# Altium PCB PCB1.pcbdoc
Units mil, origin at the board's own origin, x right, y up, seen from the top; angles counter-clockwise.
Board outline 6855 x 3415 mil, 2 copper layers (Top Layer, Bottom Layer), stack 1.928 mil thick; 4 components, 5 nets, 37 pads, 33 vias.
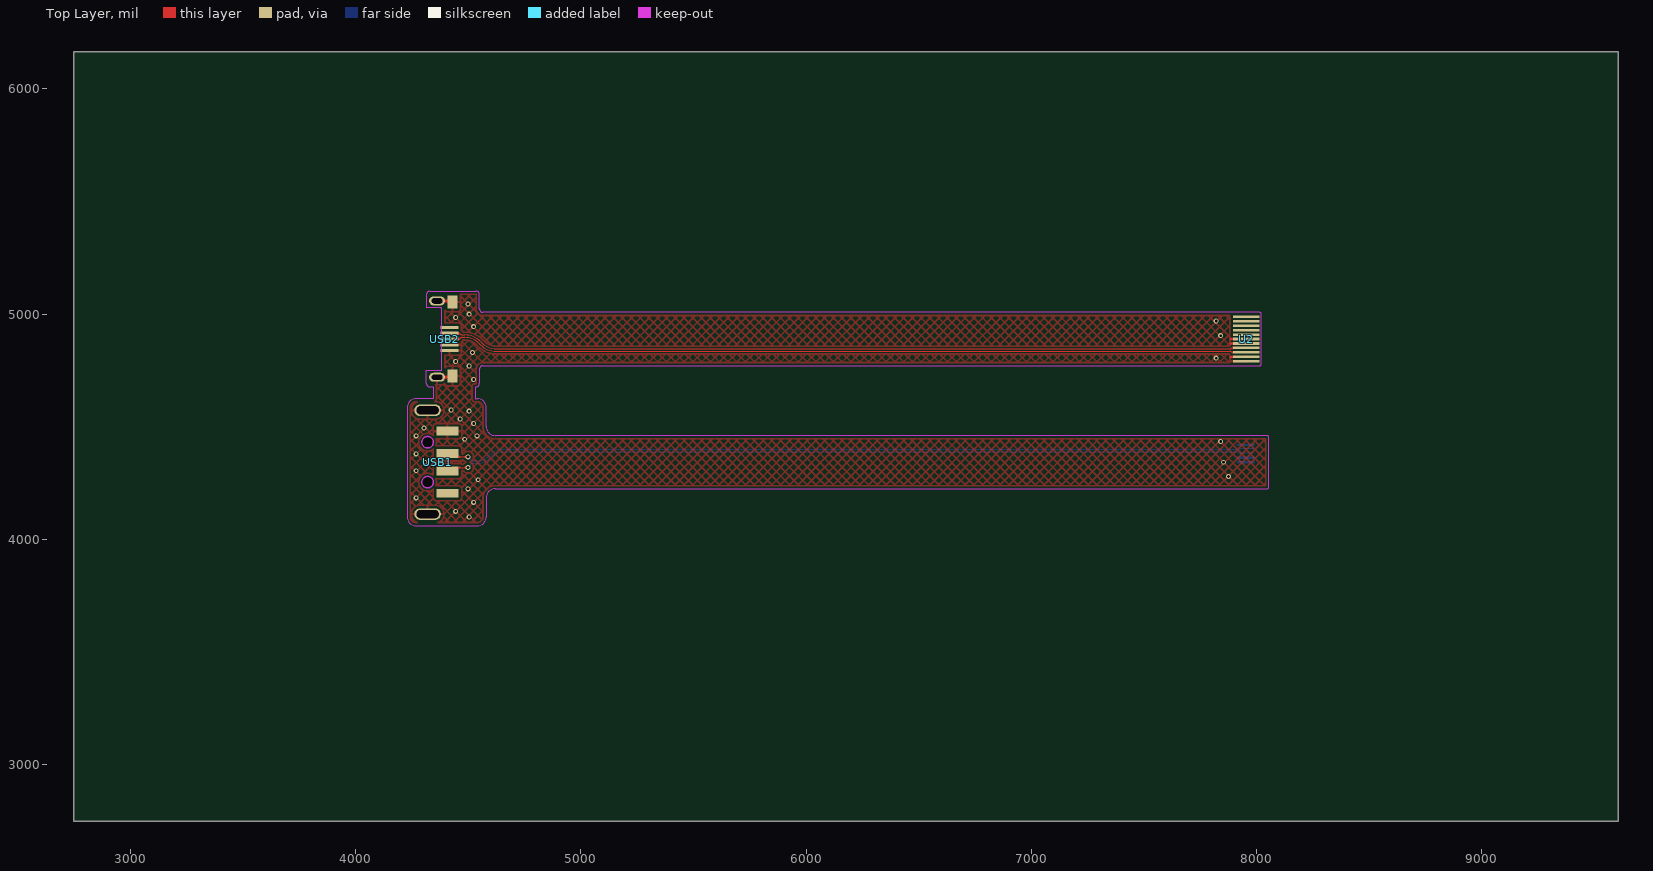
[diagram p0: Top Layer view]
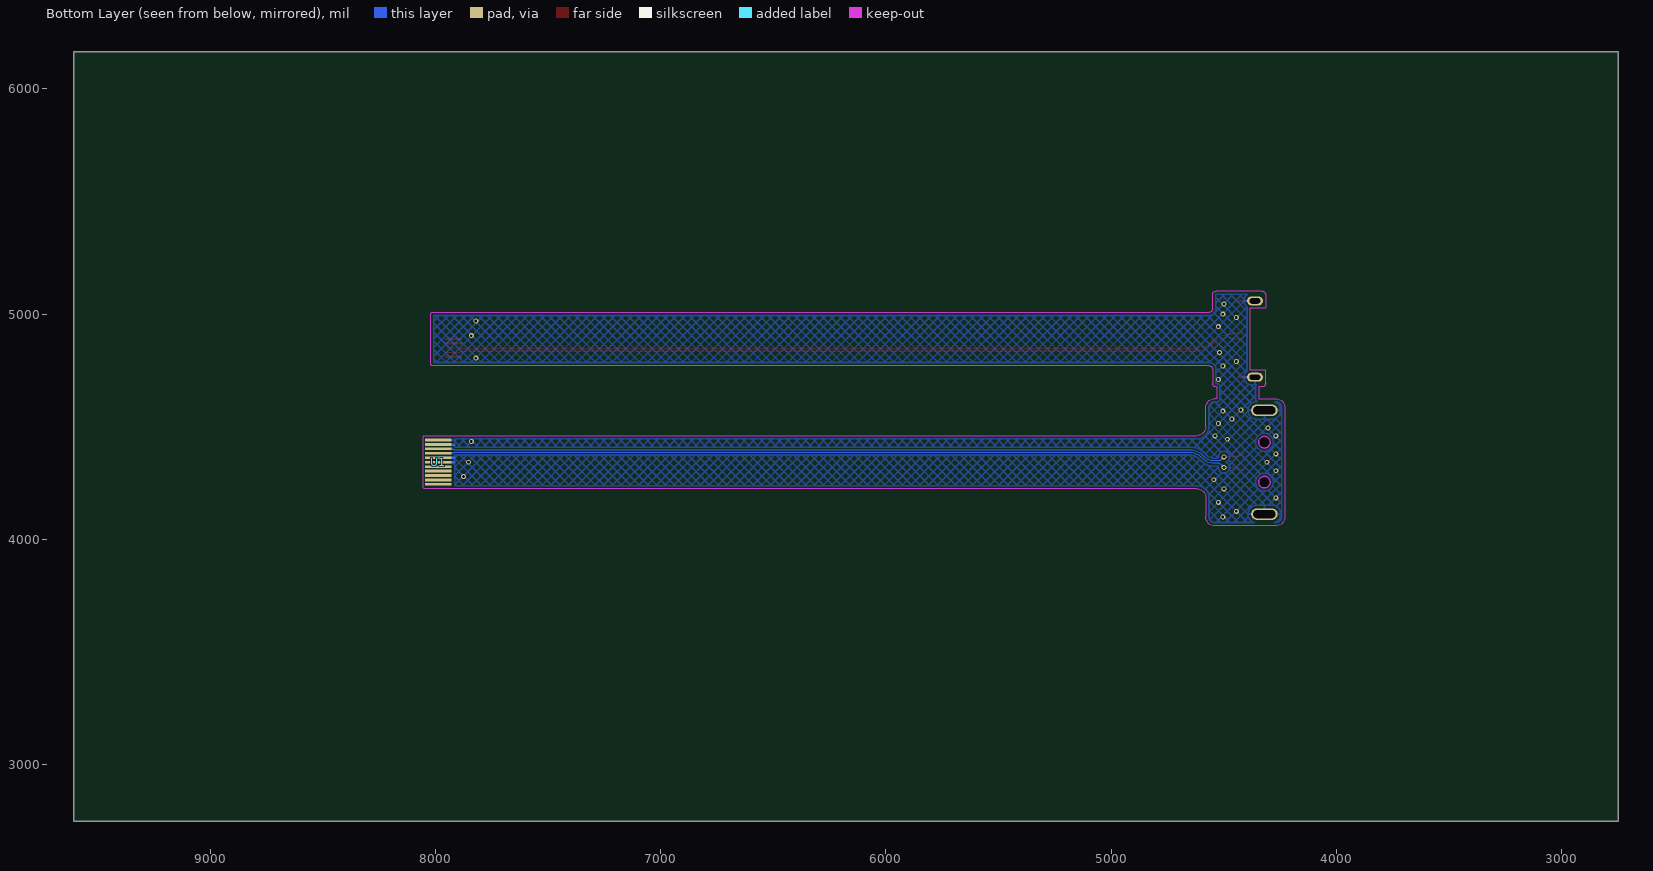
[diagram p1: Bottom Layer view, seen from below]

## Layer stack, top to bottom
Top Solder Mask Layer: solder mask 1.063, Dk 3.3
Top Layer: signal copper 0.472
Dielectric1: surface 0.984, FR4, Dk 4.5
Bottom Layer: signal copper 0.472
Bottom Solder Mask Layer: solder mask 1.063, Dk 3.3

## Board outline
9605,2750 2750,2750 2750,6165 9605,6165

## Design rules (kind name [scope] priority, off if disabled: settings)
BoardOutlineClearance copperThickness2oz_1 [All] p2 off: genericclearance=7.99 ignorepadtopadclearanceinfootprint=FALSE except(0: Arc-SplitContinuation Track-SplitContinuation SMDPad-SplitContinuation THPad-SplitContinuation Via-SplitContinuation Fill-SplitContinuation Region-SplitContinuation Poly-SplitContinuation Text-SplitContinuation Hole-SplitContinuation; 5.98: Arc-CutoutEdge SMDPad-CutoutEdge THPad-CutoutEdge Via-CutoutEdge Fill-CutoutEdge Region-CutoutEdge Text-CutoutEdge; 6.93: Hole-OutlineEdge Hole-CutoutEdge; 10: Poly-OutlineEdge Poly-CutoutEdge; 11.81: Arc-OutlineEdge Track-OutlineEdge SMDPad-OutlineEdge THPad-OutlineEdge Via-OutlineEdge Fill-OutlineEdge Region-OutlineEdge Text-OutlineEdge Track-CutoutEdge)
BoardOutlineClearance copperThickness1oz_1 [All] p4: genericclearance=4.02 ignorepadtopadclearanceinfootprint=FALSE except(0: Arc-SplitContinuation Track-SplitContinuation SMDPad-SplitContinuation THPad-SplitContinuation Via-SplitContinuation Fill-SplitContinuation Region-SplitContinuation Poly-SplitContinuation Text-SplitContinuation Hole-SplitContinuation; 6: SMDPad-CutoutEdge THPad-CutoutEdge Via-CutoutEdge Fill-CutoutEdge Region-CutoutEdge Text-CutoutEdge; 6.93: Hole-OutlineEdge Hole-CutoutEdge; 10: Poly-OutlineEdge Poly-CutoutEdge; 11.8: Arc-OutlineEdge Track-OutlineEdge SMDPad-OutlineEdge THPad-OutlineEdge Via-OutlineEdge Fill-OutlineEdge Region-OutlineEdge Text-OutlineEdge; 11.81: Arc-CutoutEdge Track-CutoutEdge)
Clearance copperThickness2oz [All] p1 off: gap=7.99 ignorepadtopadclearanceinfootprint=FALSE except(5.98: SMDPad-Track SMDPad-SMDPad THPad-Track SMDPad-THPad THPad-THPad Track-Via SMDPad-Via THPad-Via Via-Via Fill-Track Region-Track Fill-SMDPad Region-SMDPad Fill-THPad Region-THPad Fill-Via Region-Via Fill-Fill Fill-Region Region-Region Arc-Track Arc-SMDPad Arc-THPad Arc-Via Fill-Arc Region-Arc Arc-Arc Text-Track SMDPad-Text Text-THPad Text-Via Fill-Text Region-Text Arc-Text Text-Text; 6.93: Hole-Track Hole-SMDPad Hole-THPad Hole-Via Fill-Hole Region-Hole Hole-Arc Hole-Text; 10: Poly-Track Poly-SMDPad Poly-THPad Poly-Via Poly-Fill Poly-Region Poly-Poly Poly-Arc Poly-Text Poly-Hole)
Clearance copperThickness1oz [All] p3: gap=4.02 ignorepadtopadclearanceinfootprint=FALSE except(5.51: Poly-Track; 5.98: SMDPad-Track SMDPad-SMDPad THPad-Track SMDPad-THPad THPad-THPad Track-Via SMDPad-Via THPad-Via Via-Via Fill-Track Region-Track Fill-SMDPad Region-SMDPad Fill-THPad Region-THPad Fill-Via Region-Via Fill-Fill Fill-Region Region-Region; 6: Arc-Track Arc-SMDPad Arc-THPad Arc-Via Fill-Arc Region-Arc Arc-Arc Text-Track SMDPad-Text Text-THPad Text-Via Fill-Text Region-Text Arc-Text Text-Text; 6.93: Hole-Track Hole-SMDPad Hole-THPad Hole-Via Fill-Hole Region-Hole Hole-Arc Hole-Text; 10: Poly-SMDPad Poly-THPad Poly-Via Poly-Fill Poly-Region Poly-Poly Poly-Arc Poly-Text Poly-Hole)
Creepage creepage [All] p1: checkdistance=0 ignoreinternallayers=TRUE applytopolygonpour=TRUE
DiffPairsRouting differentialPair [All] p1: maxlimit=6 minlimit=6 mostfreqgap=6 toplayer_minwidth=0.4 toplayer_prefwidth=5.1 toplayer_maxwidth=118.1 toplayer_mingap=0.4 toplayer_prefgap=5.9 toplayer_maxgap=5.9 bottomlayer_minwidth=0.4 bottomlayer_prefwidth=5.1 bottomlayer_maxwidth=118.1 bottomlayer_mingap=0.4 bottomlayer_prefgap=5.9 bottomlayer_maxgap=5.9 maxuncoupledlength=10
HoleToHoleClearance otherClearance [All] p1: gap=11.81 allowstackedmicrovias=TRUE
Length netLength [All] p1: minlimit=0 maxlimit=0
MatchedLengths netLengthTolerance [All] p1: tolerance=1000
PasteMaskExpansion pasteMaskExpansion [All] p1: expansion=0
PlaneConnect innerPlane [All] p1: planeconnectstyle=Relief reliefexpansion=20 reliefentries=4 reliefconductorwidth=10 reliefairgap=10
PolygonConnect "copperRegion_Top Layer" [(OnLayer('Top Layer'))] p1: connectstyle=Relief reliefconductorwidth=10 reliefentries=4 polygonreliefangle="90 Angle" airgapwidth=10 via.connectstyle=Relief via.reliefconductorwidth=10 via.reliefentries=4 via.polygonreliefangle="90 Angle" via.airgapwidth=10
PolygonConnect "copperRegion_Bottom Layer" [(OnLayer('Bottom Layer'))] p2: connectstyle=Relief reliefconductorwidth=10 reliefentries=4 polygonreliefangle="90 Angle" airgapwidth=10 via.connectstyle=Relief via.reliefconductorwidth=10 via.reliefentries=4 via.polygonreliefangle="90 Angle" via.airgapwidth=10
PolygonConnect copperRegion [All] p3: connectstyle=Direct reliefconductorwidth=10 reliefentries=4 polygonreliefangle="90 Angle" airgapwidth=10 via.connectstyle=Relief via.reliefconductorwidth=10 via.reliefentries=4 via.polygonreliefangle="90 Angle" via.airgapwidth=10
RoutingVias viaSize [All] p1: holewidth=11.81 width=21.65 viastyle="Through Hole" minholewidth=11.81 minwidth=19.68 maxholewidth=248.03 maxwidth=393.7
SolderMaskExpansion solderMaskExpansion [IsVia] p1: expansion=-1000 istentingtop=TRUE
SolderMaskExpansion solderMaskExpansion [All] p2: expansion=2 istentingtop=FALSE
Width copperThickness2oz_2 [All] p1 off: maxlimit=100 minlimit=8 preferedwidth=10
Width copperThickness1oz_2 [All] p2: maxlimit=100 minlimit=5 preferedwidth=10

## Components (designator, comment, footprint, x,y, rotation, side; value= is the part's Value field where it differs from the comment)
U1 "" BL-M8812EU2-FPC#1 7987.09,4343.11 r180 bottom
U2 "" BL-M8812EU2-FPC#2 7954.02,4888.15 r180 top
USB1 "USB-212-BCW" USB-A-SMD_USB-212-BCW 4365,4343.11 r270 top
USB2 "MICRO-ZD-103PWB" MICRO-USB-SMD_ZD-103PWB 4397.13,4889.72 r90 top

## Footprints (in the part's own frame and the unit in brackets; to place one, negate y for a bottom-side part, rotate by r counter-clockwise, add the part's x,y. Pads: shape width x height; smd on the part's side, far side on the other; paste and mask are expansions set on the pad)
BL-M8812EU2-FPC#1 [mm]
  rect 3x0.3 smd: 1(0,2.5) 2(0,2) 3(0,1.5) 4(0,1) 5(0,0.5) 6(0,0) 7(0,-0.5) 8(0,-1) 9(0,-1.5) 10(0,-2) 11(0,-2.5)
BL-M8812EU2-FPC#2 [mm]
  rect 3x0.3 smd: 1(0,2.46) 2(0,1.96) 3(0,1.46) 4(0,0.96) 5(0,0.46) 6(0,-0.04) 7(0,-0.54) 8(0,-1.04) 9(0,-1.54) 10(0,-2.04) 11(0,-2.54)
MICRO-USB-SMD_ZD-103PWB [mm]
  rect 0.35x2 smd paste-100 mask+0.051: 1(1.3,-0.525) 2(0.65,-0.525) 3(0,-0.525) 4(-0.65,-0.525) 5(-1.3,-0.525)
  oval 1x1.8 hole 0.6 slot 1.2 at 90 deg: 6(-4.3,0.875) 6(4.3,0.875)
  rect 1.5x1.1 smd paste-100 mask+0.051: 7(-4.175,-0.875) 7(4.175,-0.875)
USB-A-SMD_USB-212-BCW [mm]
  rect 1x2.5 smd paste-100 mask+0.051: 1(3.5,1.125) 2(1,1.125) 3(-1,1.125) 4(-3.5,1.125)
  oval 1.3x3 hole 0.9 slot 2.5 at 90 deg: 5(-5.85,-1.125) 5(5.85,-1.125)
  Board Outline Layer circle w0.003: c-2.25,-1.125 r0.65
  Board Outline Layer circle w0.003: c2.25,-1.125 r0.65
  Board Outline Layer region: -2.25,-0.475 -1.968,-0.539 -1.742,-0.72 -1.616,-0.98 -1.616,-1.27 -1.742,-1.53 -1.968,-1.711 -2.25,-1.775 -2.25,-1.775 -2.532,-1.711 -2.758,-1.53 -2.884,-1.27 -2.884,-0.98 -2.758,-0.72 -2.532,-0.539 -2.25,-0.475
  Board Outline Layer region: -2.25,-0.475 -2.137,-0.485 -2.028,-0.514 -1.925,-0.562 -1.832,-0.627 -1.752,-0.707 -1.687,-0.8 -1.639,-0.903 -1.61,-1.012 -1.6,-1.125 -1.61,-1.238 -1.639,-1.347 -1.687,-1.45 -1.752,-1.543 -1.832,-1.623 -1.925,-1.688 -2.028,-1.736 -2.137,-1.765 -2.25,-1.775 -2.363,-1.765 -2.472,-1.736 -2.575,-1.688 -2.668,-1.623 -2.748,-1.543 -2.813,-1.45 -2.861,-1.347 -2.89,-1.238 -2.9,-1.125 -2.89,-1.012 -2.861,-0.903 -2.813,-0.8 -2.748,-0.707 -2.668,-0.627 -2.575,-0.562 -2.472,-0.514 -2.363,-0.485
  Board Outline Layer region: 2.25,-0.475 2.532,-0.539 2.758,-0.72 2.884,-0.98 2.884,-1.27 2.758,-1.53 2.532,-1.711 2.25,-1.775 2.25,-1.775 1.968,-1.711 1.742,-1.53 1.616,-1.27 1.616,-0.98 1.742,-0.72 1.968,-0.539 2.25,-0.475
  Board Outline Layer region: 2.25,-0.475 2.363,-0.485 2.472,-0.514 2.575,-0.562 2.668,-0.627 2.748,-0.707 2.813,-0.8 2.861,-0.903 2.89,-1.012 2.9,-1.125 2.89,-1.238 2.861,-1.347 2.813,-1.45 2.748,-1.543 2.668,-1.623 2.575,-1.688 2.472,-1.736 2.363,-1.765 2.25,-1.775 2.137,-1.765 2.027,-1.736 1.925,-1.688 1.832,-1.623 1.752,-1.543 1.687,-1.45 1.639,-1.347 1.61,-1.238 1.6,-1.125 1.61,-1.012 1.639,-0.903 1.687,-0.8 1.752,-0.707 1.832,-0.627 1.925,-0.562 2.027,-0.514 2.137,-0.485
  Multi-Layer board cut-out: -2.25,-0.475 -1.968,-0.539 -1.742,-0.72 -1.616,-0.98 -1.616,-1.27 -1.742,-1.53 -1.968,-1.711 -2.25,-1.775 -2.25,-1.775 -2.532,-1.711 -2.758,-1.53 -2.884,-1.27 -2.884,-0.98 -2.758,-0.72 -2.532,-0.539 -2.25,-0.475
  Multi-Layer board cut-out: 2.25,-0.475 2.532,-0.539 2.758,-0.72 2.884,-0.98 2.884,-1.27 2.758,-1.53 2.532,-1.711 2.25,-1.775 2.25,-1.775 1.968,-1.711 1.742,-1.53 1.616,-1.27 1.616,-0.98 1.742,-0.72 1.968,-0.539 2.25,-0.475

## Via types
v1: diameter 21.65, hole 11.8, Top Layer to Bottom Layer, 33 vias

## Nets (pads, with @x,y where several pads share a name; then routed paths per layer and width w, separated by ;. In a path a pad name is that pad's centre, name@x,y a point inside that pad or via, vN(x,y) a via of type N, cw(c..) or ccw(c..) an arc to the next point about the centre after c; other vN are vias at no path point)
$1N1: U2.3 USB2.3 | length 3556.9
  Top Layer w5.12: USB2.3 4457.1,4889.73 ccw(c4457.1,4902.24) 4465.95,4893.39 cw(c4474.69,4884.66) 4474.69,4897.01 4485.54,4897.01 cw(c4485.54,4808.04) 4548.46,4870.95 4555.12,4864.29 ccw(c4625.83,4935) 4625.83,4835 7882.45,4835 cw(c7882.45,4827.61) 7887.68,4832.84 ccw(c7892.9,4838.06) 7892.9,4830.67 U2.3
$1N2: U2.4 USB2.2 | length 3556.9
  Top Layer w5.12: USB2.2 4457.1,4915.32 cw(c4457.1,4902.81) 4465.95,4911.66 ccw(c4474.69,4920.39) 4474.69,4908.04 4485.54,4908.04 cw(c4485.54,4808.04) 4556.25,4878.75 4562.92,4872.08 ccw(c4625.83,4935) 4625.83,4846.02 7882.45,4846.02 ccw(c7882.45,4853.42) 7887.68,4848.19 cw(c7892.9,4842.96) 7892.9,4850.35 U2.4
$1N7: U1.3 USB1.3 | length 3604.7
  Top Layer w5.12: USB1.3 cw(c4409.29,4371.46) 4417.08,4379.26 ccw(c4447.32,4409.49) 4447.32,4366.73 v1(4500,4366.73)
  Bottom Layer w5.12: v1(4500,4366.73) 4514.49,4352.24 ccw(c4523.23,4360.98) 4523.23,4348.62 4545,4348.62 ccw(c4545,4405.65) 4585.33,4365.33 4595,4375 cw(c4650.13,4319.87) 4650.13,4397.83 7915.52,4397.83 ccw(c7915.52,4405.23) 7920.75,4400 cw(c7925.98,4394.77) 7925.98,4402.17 U1.3
$1N8: U1.4 USB1.2 | length 3604.7
  Top Layer w5.12: USB1.2 ccw(c4409.29,4314.77) 4417.08,4306.97 cw(c4447.3,4276.76) 4447.3,4319.49 v1(4500,4319.49)
  Bottom Layer w5.12: v1(4500,4319.49) 4514.49,4333.98 cw(c4523.23,4325.24) 4523.23,4337.6 4545,4337.6 ccw(c4545,4405.65) 4593.12,4357.53 4602.79,4367.21 cw(c4650.13,4319.87) 4650.13,4386.81 7915.52,4386.81 cw(c7915.52,4379.42) 7920.75,4384.65 ccw(c7925.98,4389.87) 7925.98,4382.48 U1.4
GND: U1.1 U1.2 U1.5 U1.6 U2.1 U2.2 U2.5 U2.6 USB1.4 USB1.5 USB2.4 USB2.5 USB2.6 USB2.7 | length 568.5
  Top Layer w10: USB2.6@4362.68,4720.43 4426.66,4720.43 ccw(c4426.66,4725.35) USB2.7@4431.58,4725.35 ; USB2.6@4362.68,5059.02 4426.65,5059.02 cw(c4426.65,5054.09) USB2.7@4431.58,5054.09 ; 7885,4810 7953.03,4810 ccw(c7953.03,4810.98) U2.2 ; 7885,4870 U2.5 ; 7885,4890 7953.74,4890 cw(c7953.74,4889.72) U2.6
  Bottom Layer w10: 7915,4343.11 U1.6 ; 7915,4362.8 U1.5 ; 7915,4420 7985.24,4420 ccw(c7985.24,4421.85) U1.2
  other v1: 4505,4100 4445,4125 4525,4165 4270,4185 4500,4225 4545,4265 7875,4280 4270,4305 4309.94,4343.11 7852.98,4343.11 4270,4380 7840,4435 4485,4445 4270,4460 4540,4460 4305,4495 4525,4515 4465,4535 4505,4570 4425,4575 4525,4710 4505,4770 4445,4790 7820,4805 4520,4830 7840,4905 4525,4945 7820,4970 4445,4985 4505,5000 4500,5045
pads on no net: U1.7 U1.8 U1.9 U1.10 U1.11 U2.7 U2.8 U2.9 U2.10 U2.11 USB1.1 USB2.1

## Polygon pours and split planes (outlines as drawn)
GND on Bottom Layer (hatched 45Degree grid 27.558999999999997 track 7.874, remove dead copper, pour order 2): 3000,5915 3000,3390 8670,3390 8670,5915
GND on Top Layer (hatched 45Degree grid 27.558999999999997 track 7.874, remove dead copper, pour order 0): 3195,5620 3195,3000 9355,3000 9355,5620

## Keep-outs
Board Outline Layer:
  lines w3.94: 4330.82,4677.13 4345.83,4677.13 4345.83,4625 4269.37,4625 ccw(c4269.37,4585.63) 4230,4585.63 4230,4100.59 ccw(c4269.37,4100.59) 4269.37,4061.22 4541.26,4061.22 ccw(c4541.26,4100.59) 4580.63,4100.59 4580.63,4185.63 cw(c4620,4185.63) 4620,4225 8046.14,4225 ccw(c8046.14,4232.87) 8054.02,4232.87 8054.02,4453.35 ccw(c8046.14,4453.35) 8046.14,4461.22 4620,4461.22 cw(c4620,4500.59) 4580.63,4500.59 4580.63,4585.63 ccw(c4541.26,4585.63) 4541.26,4625 4531.26,4625 4531.26,4677.13 4534.92,4677.13 ccw(c4534.92,4692.87) 4550.67,4692.87 4550.67,4755.87 cw(c4566.42,4755.87) 4566.42,4771.61 8013.07,4771.61 ccw(c8013.07,4779.49) 8020.94,4779.49 8020.94,4999.96 ccw(c8013.07,4999.96) 8013.07,5007.83 4566.42,5007.83 cw(c4566.42,5023.58) 4550.67,5023.58 4550.67,5086.57 ccw(c4534.92,5086.57) 4534.92,5102.32 4330.83,5102.32 ccw(c4330.82,5086.57) 4315.07,5086.57 4315.08,5027.52 4381.38,5027.52 cw(c4381.38,5025.09) 4383.81,5025.08 4383.82,4754.33 cw(c4381.37,4754.38) 4381.33,4751.93 4315.08,4751.93 4315.07,4692.87 ccw(c4330.82,4692.88) 4330.83,4677.13

## Other copper
Top Layer:
  region net $1N8: 4466.18,4322.05 4466.18,4316.93 4463.97,4316.67 4461.89,4315.92 4460.03,4314.7 4458.5,4313.09 4458.5,4323.43 4462.28,4322.4 4466.18,4322.05
  region net $1N7: 4466.18,4369.29 4466.18,4364.17 4462.28,4363.83 4458.5,4362.8 4458.5,4373.13 4460.03,4371.52 4461.89,4370.3 4463.97,4369.55 4466.18,4369.29
  region net $1N2: 4464.83,4915.75 4463.25,4910.64 4461.95,4911.31 4460.49,4911.46 4459.09,4911.06 4457.92,4910.17 4457.17,4908.92 4457.17,4921.72 4460.81,4918.49 4464.83,4915.75
  region net $1N1: 4463.25,4894.41 4464.83,4889.3 4460.81,4886.55 4457.17,4883.33 4457.17,4896.13 4457.92,4894.88 4459.09,4893.99 4460.49,4893.59 4461.95,4893.74 4463.25,4894.41
  region net $1N1: 7892.9,4828.11 7892.9,4833.23 7893.99,4834.06 7894.71,4835.23 7894.96,4836.58 7894.96,4824.76 7894.71,4826.11 7893.99,4827.28 7892.9,4828.11
  region net $1N2: 7892.9,4847.8 7892.9,4852.91 7893.99,4853.75 7894.71,4854.91 7894.96,4856.26 7894.96,4844.45 7894.71,4845.8 7893.99,4846.96 7892.9,4847.8
  region net $1N7: 4485.26,4364.17 4485.26,4369.29 4486.27,4369.77 4488.11,4371.03 4492.84,4374.85 4492.84,4358.61 4488.11,4362.44 4486.27,4363.7
  region net $1N8: 4485.26,4316.93 4485.26,4322.05 4486.27,4322.53 4488.11,4323.79 4492.84,4327.61 4492.84,4311.37 4488.11,4315.19 4486.27,4316.45
Bottom Layer:
  region net $1N7: 7925.98,4399.61 7925.98,4404.72 7927.06,4405.56 7927.78,4406.72 7928.03,4408.07 7928.03,4396.26 7927.78,4397.61 7927.06,4398.77 7925.98,4399.61
  region net $1N8: 7925.98,4379.92 7925.98,4385.04 7927.06,4385.87 7927.78,4387.04 7928.03,4388.39 7928.03,4376.57 7927.78,4377.92 7927.06,4379.09 7925.98,4379.92
  region net $1N7: 4512.23,4358.12 4508.61,4354.5 4507.56,4354.88 4505.37,4355.28 4499.32,4355.93 4510.81,4367.41 4511.45,4361.36 4511.86,4359.17
  region net $1N8: 4508.61,4331.72 4512.23,4328.1 4511.86,4327.05 4511.45,4324.86 4510.81,4318.81 4499.32,4330.29 4505.37,4330.94 4507.56,4331.34

## Silkscreen, mask and mechanical layers (free items; w line width, h text height)
Top Stiffener Layer:
  region: 7825.67,4461.22 ccw(c7825.67,4453.35) 7817.8,4453.35 7817.8,4232.87 ccw(c7825.67,4232.87) 7825.67,4225 8046.14,4225 ccw(c8046.14,4232.87) 8054.02,4232.87 8054.02,4453.35 ccw(c8046.14,4453.35) 8046.14,4461.22
Bottom Stiffener Layer:
  region: 53 vertices and 4 holes, not listed, extent 4230,4061.22 4580.63,4625
  region: 8013.07,4771.61 ccw(c8013.07,4779.49) 8020.94,4779.49 8020.94,4999.96 ccw(c8013.07,4999.96) 8013.07,5007.83 7792.6,5007.83 ccw(c7792.6,4999.96) 7784.72,4999.96 7784.72,4779.49 ccw(c7792.6,4779.49) 7792.6,4771.61
  region: 4315.08,4692.87 4315.08,4751.93 4381.33,4751.93 4381.33,5027.52 4315.08,5027.52 4315.08,5086.57 4315.47,5090.08 4316.64,5093.41 4318.51,5096.39 4321.01,5098.89 4323.99,5100.76 4327.32,5101.93 4330.83,5102.32 4534.92,5102.32 4538.43,5101.93 4541.75,5100.76 4544.74,5098.89 4547.23,5096.39 4549.11,5093.41 4550.27,5090.08 4550.67,5086.57 4550.67,4692.87 4550.27,4689.37 4549.11,4686.04 4547.23,4683.06 4544.74,4680.56 4541.75,4678.69 4538.43,4677.52 4534.92,4677.13 4330.83,4677.13 4327.32,4677.52 4323.99,4678.69 4321.01,4680.56 4318.51,4683.06 4316.64,4686.04 4315.47,4689.37 hole: 43410214,47204264 43413567.8,47178789.7 43423400.4,47155051.5 43439042,47134667 43459426.5,47119025.4 43483164.7,47109192.8 43508639,47105839 43508639,47105839 43744859,47105839 43744859,47105839 43770333.3,47109192.8 43794071.5,47119025.4 43814456,47134667 43830097.6,47155051.5 43839930.2,47178789.7 43843284,47204264 43843284,47204264 43839930.2,47229738.3 43830097.6,47253476.5 43814456,47273861 43794071.5,47289502.6 43770333.3,47299335.2 43744859,47302689 43744859,47302689 43508639,47302689 43508639,47302689 43483164.7,47299335.2 43459426.5,47289502.6 43439042,47273861 43423400.4,47253476.5 43413567.8,47229738.3 43410214,47204264 hole: 43410214,50590244 43413567.8,50564769.7 43423400.4,50541031.5 43439042,50520647 43459426.5,50505005.4 43483164.7,50495172.8 43508639,50491819 43508639,50491819 43744859,50491819 43744859,50491819 43770333.3,50495172.8 43794071.5,50505005.4 43814456,50520647 43830097.6,50541031.5 43839930.2,50564769.7 43843284,50590244 43843284,50590244 43839930.2,50615718.3 43830097.6,50639456.5 43814456,50659841 43794071.5,50675482.6 43770333.3,50685315.2 43744859,50688669 43744859,50688669 43508639,50688669 43508639,50688669 43483164.7,50685315.2 43459426.5,50675482.6 43439042,50659841 43423400.4,50639456.5 43413567.8,50615718.3 43410214,50590244
  region: 4350,4685 4350,4625 4528.54,4625 4528.54,4685